# EAGLE board Aux Power Board V2.1 (EAGLE 9.6.2)
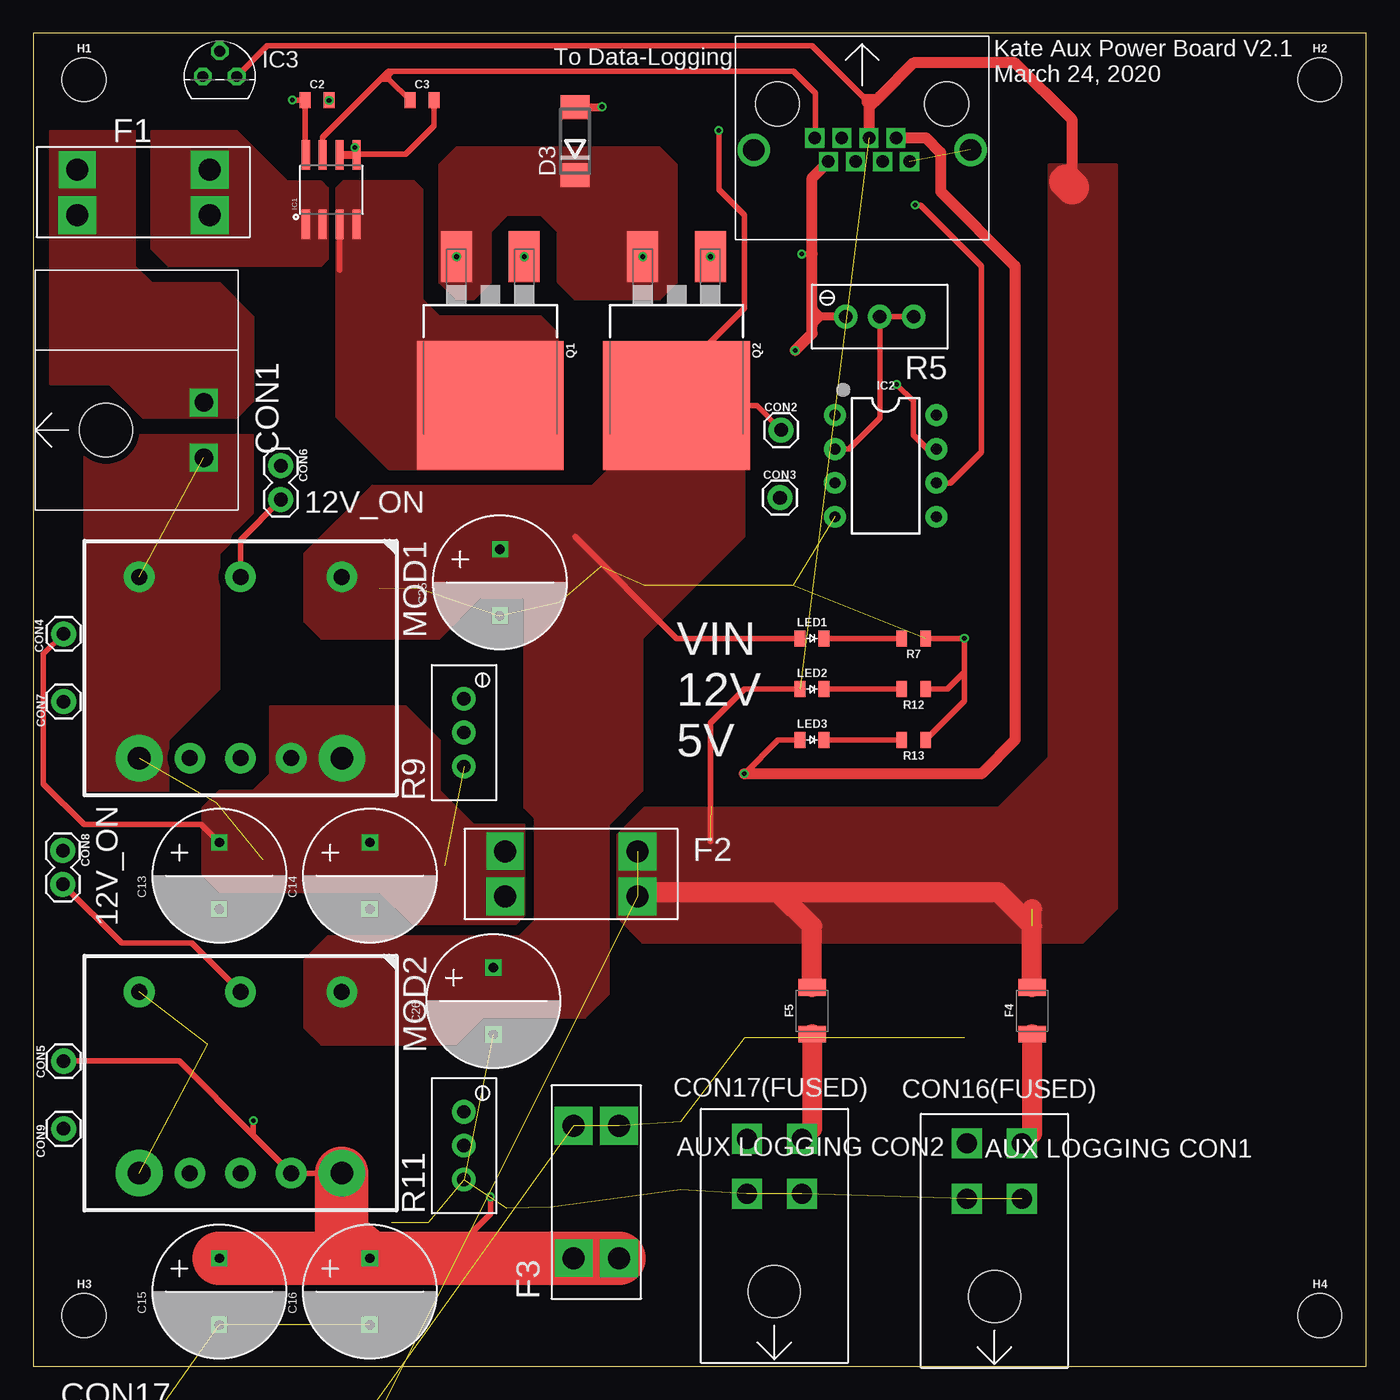
[diagram p0: board, top side]
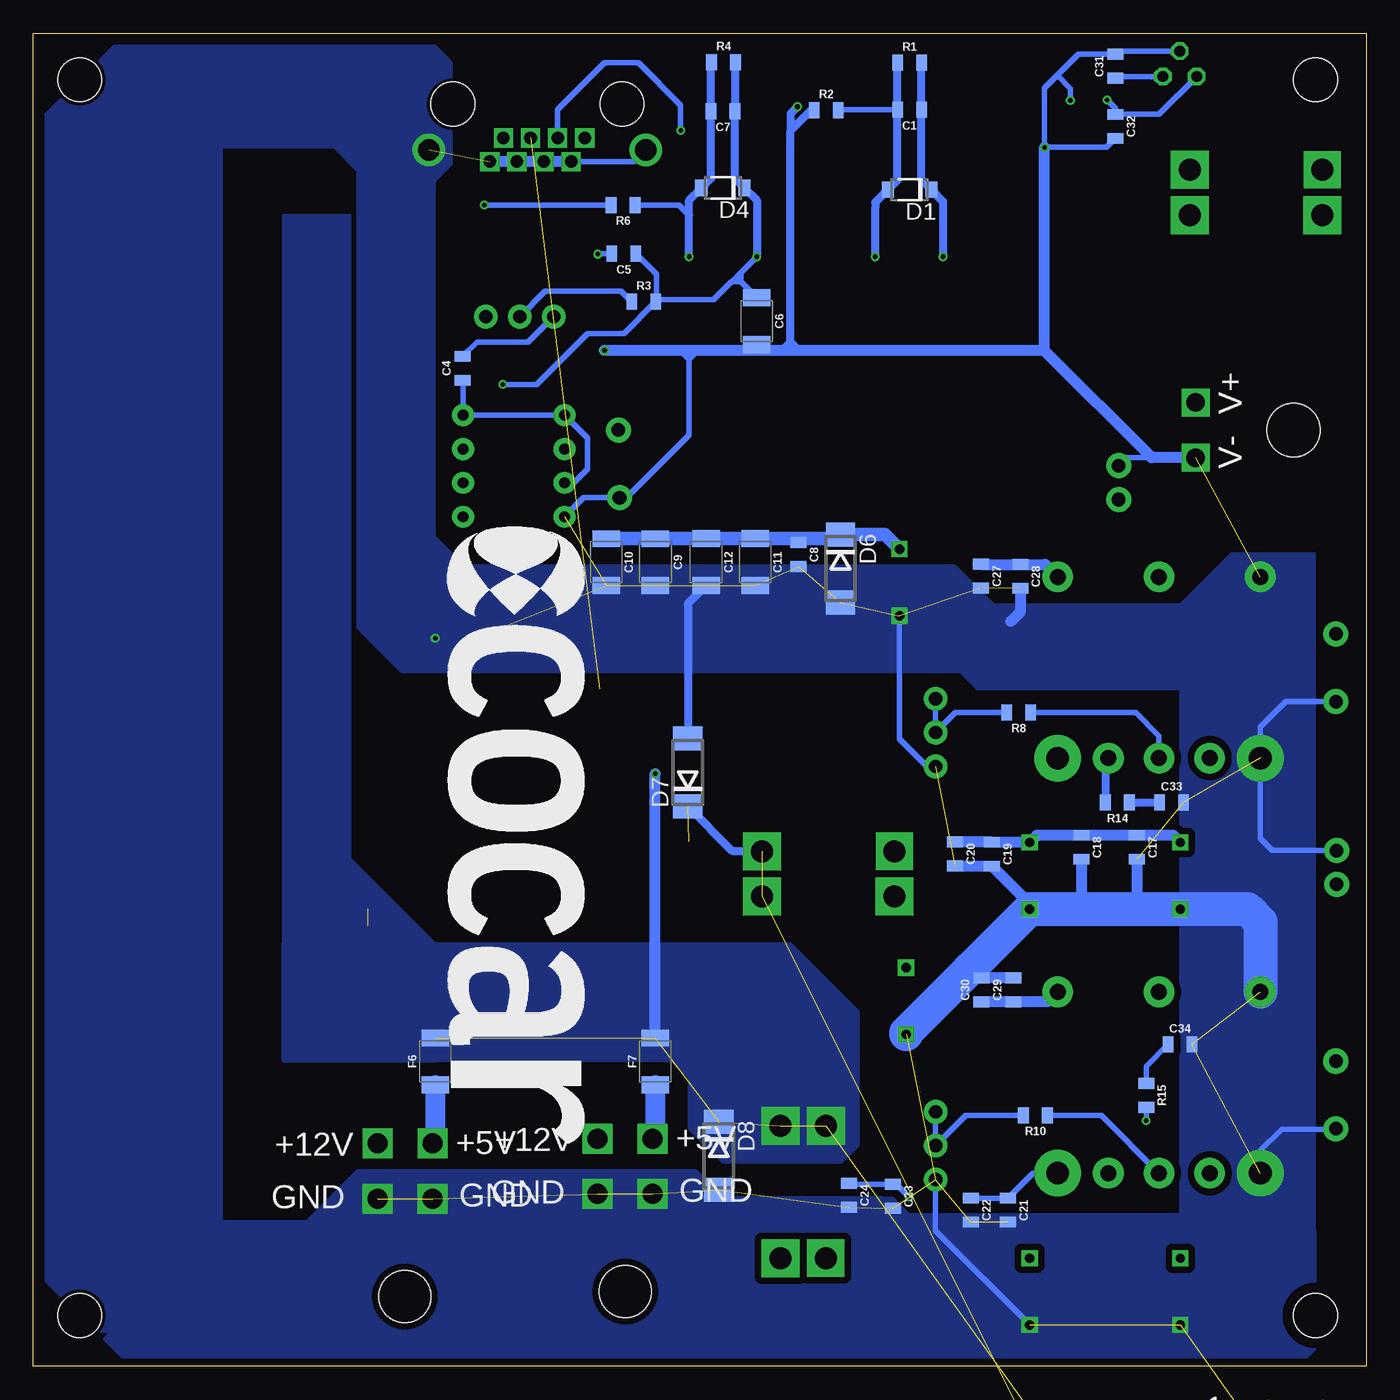
[diagram p1: board, bottom side, seen from below]

Size 100 x 100 mm. Coordinates in mm from the lower left corner, seen from the top.
Outline: 0,0 100,0 100,100 0,100 0,0
Copper layers (1*16): Top 0.035mm / dielectric 1.5mm / Bottom 0.035mm
Design rules "SeeedStudio_2layer_DRU_no_angle_20140221": minimum track width 6mil, minimum drill 12mil, track to track 6mil, track to pad 6mil, pad to pad 6mil, via to via 6mil, smd to smd 0mil, copper to edge 10mil, drill to drill 10mil, minimum pad ring 10mil, minimum via ring 6mil, stop-mask expansion 2mil, vias tented up to drill 100mil, thermal gap 10mil

## Footprints (pad centres in the part's own frame; a part is rotated, then mirrored left to right if it is on the bottom)
0805 = smd 0.8 x 1.2: 1 -0.9,0; 2 0.9,0
1210 = smd 1.27 x 2.06: 1 -1.755,0; 2 1.755,0
CAPACITOR_220UF_63V = drill 0.7 square: + 2.5,0; - -2.5,0
TE_2-PIN = drill 1.4 square: 1 -2.07,12.67; 2 2.07,12.67 | hole 4: 0,5.33
1X01 = drill 1.016 pad 1.88: 1 0,0
1X02 = drill 1.016 pad 1.88: 1 0,0; 2 2.54,0
TE_6-PIN = drill 1.5 square: 1 4.14,11.48; 2 0,11.48; 3 -4.14,11.48; 4 4.14,7.34; 5 0,7.34; 6 -4.14,7.34 | hole 3.91: 0,0
TE_4-PIN = drill 1.5 square: 1 2.07,11.48; 2 -2.07,11.48; 3 2.07,7.34; 4 -2.07,7.34 | hole 3.91: 0,0
RJ45 = drill 0.94 square: 1 9.9,2.54; 2 8.88,4.32; 3 7.87,2.54; 4 6.85,4.32; 5 5.84,2.54; 6 4.82,4.32; 7 3.81,2.54; 8 2.79,4.32 | drill 1.62: 9 -1.78,3.43; 10 14.48,3.43 | hole 3.3: 0,0; 12.7,0
SOD123FL = smd 0.91 x 1.22: A 1.625,0; C -1.625,0
DO214AA = smd 1.8 x 2.2: A 2.55,0; C -2.55,0
FUSEHOLDER_VERTICAL = drill 1.65 pad 2.85 square: 1 3.045,1.665; 3 12.965,1.665; 4 12.965,5.065 | drill 1.65 pad 2.8 square: 2 3.045,5.065
STAND-OFF = hole 3.302: 0,0
SOIC8 = smd 0.61 x 2.21: 1 -1.905,-2.616; 2 -0.635,-2.616; 3 0.635,-2.616; 4 1.905,-2.616; 5 1.905,2.616; 6 0.635,2.616; 7 -0.635,2.616; 8 -1.905,2.616
DIP08 = drill 0.813 pad 1.626: 1 -3.81,-3.81; 2 -1.27,-3.81; 3 1.27,-3.81; 4 3.81,-3.81; 5 3.81,3.81; 6 1.27,3.81; 7 -1.27,3.81; 8 -3.81,3.81
TO92 = drill 0.813 octagon: 1 1.27,0; 2 0,1.905; 3 -1.27,0
0805_LED = smd 0.8 x 1.2: 1 -0.9,0; 2 0.9,0
CONVERTER_I3A = drill 1.2 pad 2.3: 1 2.7,19.3; 2 2.7,11.7; 3 2.7,4.1; 5 16.3,7.9; 6 16.3,11.7; 7 16.3,15.5 | drill 1.7 pad 3.5: 4 16.3,4.1; 8 16.3,19.3
TO-263/D2PAK = smd 2.32 x 3.81: 1 -2.54,-7.045; 3 2.54,-7.045 | smd 11 x 9.65: 2 0,4.125
TRIMPOT = drill 1 pad 1.778: 1 5.08,0; 2 2.54,0; 3 0,0

## Placement (x,y rotation side)
C1  0.1uF  [0805]  34.26,94.26 180 bottom
C2  0.1uF  [0805]  21.29,94.97 0 top
C3  1nF  [0805]  29.16,94.97 0 top
C4  1uF  [0805]  67.79,74.87 90 bottom
C5  0.1uF  [0805]  55.69,83.46 180 bottom
C6  10uF  [1210]  45.72,78.4 270 bottom
C7  0.1uF  [0805]  48.26,94.15 180 bottom
C8  0.1uF  [0805]  42.6,60.89 270 bottom
C9  10uF  [1210]  53.32,60.32 270 bottom
C10  10uF  [1210]  57.01,60.32 270 bottom
C11  10uF  [1210]  45.85,60.33 270 bottom
C12  10uF  [1210]  49.53,60.33 270 bottom
C13  220uF  [CAPACITOR_220UF_63V]  13.95,36.8 90 top
C14  220uF  [CAPACITOR_220UF_63V]  25.25,36.8 90 top
C15  220uF  [CAPACITOR_220UF_63V]  13.95,5.6 90 top
C16  220uF  [CAPACITOR_220UF_63V]  25.25,5.6 90 top
C17  0.1uF  [0805]  17.2,38.93 270 bottom
C18  10uF  [0805]  21.37,38.93 270 bottom
C19  10uF  [0805]  28.08,38.42 270 bottom
C20  10uF  [0805]  30.85,38.44 270 bottom
C21  0.1uF  [0805]  26.87,11.7 270 bottom
C22  10uF  [0805]  29.66,11.7 270 bottom
C23  10uF  [0805]  35.51,12.74 270 bottom
C24  10uF  [0805]  38.81,12.81 270 bottom
C25  220uF  [CAPACITOR_220UF_63V]  35.01,58.8 90 top
C26  220uF  [CAPACITOR_220UF_63V]  34.51,27.4 90 top
C27  1nF/50V  [0805]  28.89,59.28 270 bottom
C28  1uF/50V  [0805]  25.96,59.25 270 bottom
C29  1nF/50V  [0805]  26.47,28.23 90 bottom
C30  1uF/50V  [0805]  28.88,28.23 90 bottom
C31  1uF  [0805]  18.82,97.53 90 bottom
C32  1uF  [0805]  18.82,93.02 270 bottom
C33  [0805]  14.61,42.29 0 bottom
C34  [0805]  13.97,24.13 0 bottom
CON1  TE_2-PIN  [TE_2-PIN]  0.13,70.23 270 top
CON2  1X01  [1X01]  56.11,70.24 0 top
CON3  1X01  [1X01]  56.02,65.16 0 top
CON4  1X01  [1X01]  2.28,54.95 90 top
CON5  1X01  [1X01]  2.28,22.89 90 top
CON6  1X02  [1X02]  18.57,67.56 270 top
CON7  1X01  [1X01]  2.28,49.87 90 top
CON8  1X02  [1X02]  2.22,38.69 270 top
CON9  1X01  [1X01]  2.28,17.81 90 top
CON10  TE_6-PIN  [TE_6-PIN]  7.5,-48.75 0 top  (outside the outline)
CON11  TE_6-PIN  [TE_6-PIN]  7.5,-80 0 top  (outside the outline)
CON12  TE_6-PIN  [TE_6-PIN]  7.5,-111.25 0 top  (outside the outline)
CON13  TE_6-PIN  [TE_6-PIN]  7.5,-142.5 0 top  (outside the outline)
CON14  TE_6-PIN  [TE_6-PIN]  7.5,-173.75 0 top  (outside the outline)
CON16(FUSED)  TE_4-PIN  [TE_4-PIN]  72.11,5.23 0 top
CON17  TE_6-PIN  [TE_6-PIN]  7.5,-17.5 0 top  (outside the outline)
CON17(FUSED)  TE_4-PIN  [TE_4-PIN]  55.6,5.59 0 top
CON18  RJ45  [RJ45]  68.53,94.69 180 top
CON19  TE_2-PIN  [TE_2-PIN]  11.25,-206.88 0 top  (outside the outline)
D1  BZT52HC10WF-7  [SOD123FL]  34.26,88.27 180 bottom
D3  SMBJ22A  [DO214AA]  40.65,91.91 90 top
D4  BZT52HC10WF-7  [SOD123FL]  48.26,88.39 180 bottom
D6  SMBJ22A  [DO214AA]  39.45,59.85 270 bottom
D7  SMBJ12A  [DO214AA]  50.89,44.54 90 bottom
D8  SMBJ5.0A  [DO214AA]  48.57,15.78 270 bottom
F1  7.5A  [FUSEHOLDER_VERTICAL]  0.25,84.71 0 top
F2  7.5A  [FUSEHOLDER_VERTICAL]  32.35,33.57 0 top
F3  7.5A  [FUSEHOLDER_VERTICAL]  45.61,5.06 90 top
F4  [1210]  74.93,26.67 90 top
F5  [1210]  58.42,26.67 90 top
F6  [1210]  69.85,22.86 90 bottom
F7  [1210]  53.34,22.86 90 bottom
F8  [1210]  1.88,-25.62 0 top  (outside the outline)
F9  [1210]  7.5,-25.62 0 top  (outside the outline)
F10  [1210]  13.12,-25.62 0 top  (outside the outline)
F11  [1210]  1.88,-30 0 top  (outside the outline)
F12  [1210]  1.88,-56.88 0 top  (outside the outline)
F13  [1210]  7.5,-56.88 0 top  (outside the outline)
F14  [1210]  13.12,-56.88 0 top  (outside the outline)
F15  [1210]  1.88,-61.25 0 top  (outside the outline)
F16  [1210]  1.88,-88.12 0 top  (outside the outline)
F17  [1210]  7.5,-88.12 0 top  (outside the outline)
F18  [1210]  13.12,-88.12 0 top  (outside the outline)
F19  [1210]  1.88,-92.5 0 top  (outside the outline)
F20  [1210]  1.88,-119.38 0 top  (outside the outline)
F21  [1210]  7.5,-119.38 0 top  (outside the outline)
F22  [1210]  13.12,-119.38 0 top  (outside the outline)
F23  [1210]  1.88,-123.75 0 top  (outside the outline)
F24  [1210]  1.88,-150.62 0 top  (outside the outline)
F25  [1210]  7.5,-150.62 0 top  (outside the outline)
F26  [1210]  13.12,-150.62 0 top  (outside the outline)
F27  [1210]  1.88,-155 0 top  (outside the outline)
F28  [1210]  1.88,-181.88 0 top  (outside the outline)
F29  [1210]  7.5,-181.88 0 top  (outside the outline)
F30  [1210]  13.12,-181.88 0 top  (outside the outline)
F31  [1210]  1.88,-186.25 0 top  (outside the outline)
H1  STAND-OFF  [STAND-OFF]  3.81,96.52 0 top
H2  STAND-OFF  [STAND-OFF]  96.52,96.52 0 top
H3  STAND-OFF  [STAND-OFF]  3.81,3.81 0 top
H4  STAND-OFF  [STAND-OFF]  96.52,3.81 0 top
IC1  CURRENT-SENSOR_ACS723  [SOIC8]  22.35,88.27 0 top
IC2  OP-AMP_LM10  [DIP08]  63.95,67.54 270 top
IC3  LINEAR-REGULATOR_LP2950  [TO92]  13.99,96.76 0 top
LED1  RED  [0805_LED]  58.42,54.61 0 top
LED2  RED  [0805_LED]  58.42,50.8 0 top
LED3  RED  [0805_LED]  58.42,46.99 0 top
MOD1  i3A  [CONVERTER_I3A]  3.84,61.92 270 top
MOD2  i3A  [CONVERTER_I3A]  3.84,30.78 270 top
Q1  [TO-263/D2PAK]  34.29,76.2 180 top
Q2  [TO-263/D2PAK]  48.26,76.2 180 top
R1  100k  [0805]  34.26,97.79 0 bottom
R2  2.7k  [0805]  40.51,94.23 0 bottom
R3  100k  [0805]  54.21,79.86 0 bottom
R4  100k  [0805]  48.22,97.83 0 bottom
R5  10k  [TRIMPOT]  66.04,78.74 180 top
R6  2.7k  [0805]  55.75,87.12 180 bottom
R7  3.9k  [0805]  66.04,54.61 180 top
R8  1.6k  [0805]  26.08,49.05 180 bottom
R9  10k  [TRIMPOT]  32.31,45 90 top
R10  8.2k  [0805]  24.82,18.82 180 bottom
R11  10k  [TRIMPOT]  32.31,14 90 top
R12  2k  [0805]  66.04,50.8 180 top
R13  560  [0805]  66.04,46.99 180 top
R14  [0805]  18.67,42.29 180 bottom
R15  [0805]  16.51,20.32 270 bottom
U$7  ECOCAR_LOGO  [ECOCAR_LOGO_2018]  68.96,62.99 270 bottom

## Library data of the parts
C1-C34 R1-R15 = EcoCar-Passives
CON1 CON10-CON14 CON16(FUSED) CON17 CON17(FUSED) CON18 CON19 = EcoCar-Connectors
CON2-CON9 = EcoCar-Connectors-2.54mm
D1 D4 LED1-LED3 Q1 Q2 = EcoCar-Discrete-Semiconductors
D3 D6-D8 F1-F31 = EcoCar-Fuses-Protection
H1-H4 U$7 = EcoCar-Miscellaneous
IC1-IC3 = EcoCar-Integrated-Circuits
MOD1 MOD2 = EcoCar-Modules

## Nets
5V: CON18.7 CON19.1 D8.C F3.3 F3.4 F6.2 F7.2 F8.2 F9.2 F12.2 F13.2 F16.2 F17.2 F20.2 F21.2 F24.2 F25.2 F28.2 F29.2 LED3.1
5V_LINEAR: C2.1 C32.1 IC1.8 IC3.3
5V_PRE_FUSE: C15.+ C16.+ C21.1 C22.1 C23.1 C24.1 CON5.1 F3.1 F3.2 MOD2.7 MOD2.8 R15.2
12V: C31.1 CON18.5 D7.C F2.3 F2.4 F4.2 F5.2 F10.2 F11.2 F14.2 F15.2 F18.2 F19.2 F22.2 F23.2 F26.2 F27.2 F30.2 F31.2 IC3.1 LED2.1
12V_PRE_FUSE: C13.+ C14.+ C17.1 C18.1 C19.1 C20.1 CON4.1 F2.1 F2.2 MOD1.7 MOD1.8 R14.2
!OUTPUT_ENABLED: IC2.6 R6.2
+5V: CON17.6 F9.1
+5V1: CON10.6 F13.1
+5V2: CON11.6 F17.1
+5V3: CON12.6 F21.1
+5V4: CON13.6 F25.1
+5V5: CON14.6 F29.1
+12V: CON17.1 F11.1
+12V1: CON10.1 F15.1
+12V2: CON11.1 F19.1
+12V3: CON12.1 F23.1
+12V4: CON13.1 F27.1
+12V5: CON14.1 F31.1
BATTERY_IN: CON1.1 F1.1 F1.2
CURRENT_SENSOR_IN: F1.3 F1.4 IC1.1 IC1.2
CURRENT_SENSOR_OUT: IC1.3 IC1.4 Q1.2
GND: C2.2 C3.2 C4.2 C5.2 C6.2 C8.2 C9.2 C10.2 C11.2 C12.2 C13.- C14.- C15.- C16.- C17.2 C18.2 C19.2 C20.2 C21.2 C22.2 C23.2 C24.2 C25.- C26.- C27.2 C28.2 C29.2 C30.2 C31.2 C32.2 C33.2 C34.2 CON1.2 CON3.1 CON6.1 CON7.1 CON8.1 CON9.1 CON10.2 CON10.5 CON11.2 CON11.5 CON12.2 CON12.5 CON13.2 CON13.5 CON14.2 CON14.5 CON16(FUSED).3 CON16(FUSED).4 CON17(FUSED).3 CON17(FUSED).4 CON17.2 CON17.5 CON18.2 CON18.4 CON18.6 CON18.8 CON18.9 CON18.10 CON19.2 D3.A D6.A D7.A D8.A IC1.5 IC1.6 IC2.4 IC3.2 MOD1.3 MOD1.4 MOD2.3 MOD2.4 R2.1 R5.1 R7.1 R9.3 R11.3 R12.1 R13.1
HALL_CURRENT: C3.1 CON18.1 IC1.7
N$1: CON16(FUSED).2 F6.1
N$2: CON16(FUSED).1 F4.1
N$3: MOD1.6 R8.1
N$4: LED1.2 R7.2
N$5: C4.1 IC2.1 IC2.3 IC2.8
N$6: IC2.2 R3.1 R5.2 R5.3
N$7: R8.2 R9.1 R9.2
N$8: C7.2 D4.A Q2.1 R4.1 R6.1
N$9: C33.1 R14.1
N$10: CON17(FUSED).1 F5.1
N$11: MOD2.6 R10.1
N$12: CON17(FUSED).2 F7.1
N$13: LED3.2 R13.2
N$14: C1.2 D1.A Q1.1 R1.1 R2.2
N$15: C34.1 R15.1
N$16: CON10.3 F14.1
N$17: LED2.2 R12.2
N$18: CON17.3 F10.1
N$19: CON10.4 F12.1
N$20: CON17.4 F8.1
N$21: CON11.3 F18.1
N$22: CON11.4 F16.1
N$23: CON12.3 F22.1
N$24: CON12.4 F20.1
N$25: CON13.3 F26.1
N$26: R10.2 R11.1 R11.2
N$27: CON13.4 F24.1
N$28: CON14.3 F30.1
N$29: CON14.4 F28.1
N$30: CON6.2 MOD1.2
N$33: CON8.2 MOD2.2
REVERSE_PROT_OUT: C1.1 C5.1 C6.1 C7.1 D1.C D3.C D4.C IC2.7 Q1.3 Q2.3 R1.2 R3.2 R4.2
VIN: C8.1 C9.1 C10.1 C11.1 C12.1 C25.+ C26.+ C27.1 C28.1 C29.1 C30.1 CON2.1 CON18.3 D6.C LED1.1 MOD1.1 MOD2.1 Q2.2

## Tracks (layer width: path | path; a pad name or v marks a point on that pad's centre or on a via)
5V  (via drill 0.35)  (17 unrouted)
  Top 0.406: LED3.1 55.88,46.99 v53.34,44.45
  Top 0.813: CON18.7 66.98,92.15 68.07,91.06 68.07,88.14 73.66,82.55 73.66,46.99 71.12,44.45 v53.34,44.45
  Bottom 0.813: F7.2 v53.34,44.45
  pour Bottom (isolate 0.5, no thermals): 39.37,15.24 48.26,15.24 50.8,17.78 50.8,20.32 50.8,21.59 52.07,22.86 81.28,22.86 81.28,31.75 43.18,31.75 38.1,26.67 38.1,20.32 38.1,16.51
  pour Bottom (isolate 0.5, no thermals): 76.2,86.36 81.28,86.36 81.28,22.86 69.85,22.86 69.85,31.75 76.2,38.1
5V_LINEAR  (via drill 0.35)
  Top 0.406: IC1.8 20.39,90.94 C2.1 20.36,95 v19.43,95
  Bottom 0.406: IC3.3 15.56,93.92 C32.1 18.82,94.39 v19.43,95
5V_PRE_FUSE  (via drill 0.35)
  Top 0.406: MOD2.8 MOD2.7 16.91,16.91 16.51,17.31 | 16.51,17.31 10.93,22.89 CON5.1 | C16.+ 30.96,8.1 34.29,11.43 v34.29,12.7 | 16.51,17.31 v16.51,18.41
  Top 4: MOD2.8 23.14,9.86 C16.+ | C15.+ C16.+ | C16.+ 35.34,8.1 35.35,8.11 F3.2 F3.1
  Bottom 0.406: MOD2.8 24.99,14.48 C21.1 C22.1 | v34.29,12.7 35.23,13.64 C23.1 38.73,13.64 C24.1 | v16.51,18.41 R15.2
12V  (16 unrouted)
  Top 0.406: LED2.1 53.34,50.8 50.8,48.26 50.8,39.37 | CON18.5 62.7,94.78 62.36,95.12 | 62.36,95.12 62.23,95.25 | 62.23,95.25 58.42,99.06 17.56,99.06 IC3.1 | 63.5,95.25 62.23,95.25 | 62.7,94.44 62.36,94.78 62.36,95.12
  Top 0.813: 77.94,88.43 77.94,93.51 73.66,97.79 66.04,97.79 63.5,95.25 62.7,94.44 CON18.5
  Top 1.5: F5.2 58.42,33.02 55.88,35.56 | 55.88,35.56 45.64,35.56 F2.3 | 74.93,33.02 72.39,35.56 55.88,35.56 | F4.2 74.93,34.29
  Top 2.54: 77.94,88.43 77.47,88.9
  Bottom 0.406: IC3.1 18.7,96.76 C31.1
  Bottom 0.61: F2.4 47.53,38.63 D7.C
  pour Top (isolate 0.5, no thermals): 43.81,33.78 43.81,39.88 45.09,41.15 45.85,41.91 50.8,41.91 72.39,41.91 76.2,45.72 76.2,90.17 81.28,90.17 81.28,34.29 78.74,31.75 45.72,31.75 43.81,33.66
12V_PRE_FUSE
  Top 0.406: CON4.1 0.76,53.43 0.76,43.69 3.81,40.64 12.61,40.64 C13.+
  Bottom 0.61: MOD1.7 19.57,45.39 R14.2
  Bottom 0.813: C20.1 30.84,39.32 C19.1 28.06,39.3 C14.+ 24.72,39.83 C18.1 C17.1 14.48,39.83 C13.+
  pour Top (isolate 0.5, no thermals): 17.78,49.53 27.94,49.53 30.48,46.99 30.48,45.72 30.48,43.18 33.02,40.64 36.83,40.64 36.83,33.78 36.2,33.15 32.38,33.15 28.45,33.15 26.04,35.56 13.97,35.56 12.7,36.83 12.7,40.64 12.7,41.91 13.97,43.18 16.51,43.18 17.78,44.45
!OUTPUT_ENABLED  (via drill 0.35)
  Top 0.406: IC2.6 68.81,66.27 71.12,68.58 71.12,82.55 66.55,87.12 v66.17,87.12
  Bottom 0.406: v66.17,87.12 R6.2
+5V  (1 unrouted)
+5V1  (1 unrouted)
+5V2  (1 unrouted)
+5V3  (1 unrouted)
+5V4  (1 unrouted)
+5V5  (1 unrouted)
+12V  (1 unrouted)
+12V1  (1 unrouted)
+12V2  (1 unrouted)
+12V3  (1 unrouted)
+12V4  (1 unrouted)
+12V5  (1 unrouted)
BATTERY_IN
  pour Top (isolate 0.5, no thermals): 13.97,71.12 8.89,71.12 8.26,71.12 5.71,73.66 1.27,73.66 1.27,92.71 7.62,92.71 7.62,82.55 8.89,81.28 13.97,81.28 16.51,78.74 16.51,72.39 15.24,71.12
CURRENT_SENSOR_IN
  pour Top (isolate 0.5, no thermals): 8.89,92.71 15.24,92.71 19.05,88.9 20.32,88.9 21.59,88.9 22.1,88.39 22.1,84.58 22.1,83.06 21.59,82.55 10.16,82.55 8.89,83.82
CURRENT_SENSOR_OUT
  Top 0.406: IC1.3 22.99,82.22
  pour Top (isolate 0.5, no thermals): 28.57,88.9 23.24,88.9 22.73,88.39 22.73,71.25 26.67,67.31 39.37,67.31 39.37,77.47 38.1,78.74 30.48,78.74 29.21,80.01 29.21,88.27
GND  (via drill 0.35)  (41 unrouted)
  Top 0.406: R13.1 69.85,49.9 69.85,52.07 | 69.85,52.07 v69.85,54.61 R7.1 | R12.1 68.58,50.8 69.85,52.07 | C3.2 30.06,93.06 27.94,90.93 24.31,90.93 IC1.5 24.13,91.01 v24.13,91.44 | v57.66,83.44 58.42,83.44
  Top 0.61: IC1.6 IC1.5 | R5.1 59.05,78.74 | 59.05,78.74 58.42,78.74 | 59.05,78.74 58.42,79.38 | 59.05,78.74 58.42,78.11 | D3.A 42.65,94.46 v42.67,94.49
  Top 0.813: v57.15,76.2 58.42,77.47 58.42,78.11 58.42,78.74 58.42,79.38 58.42,83.44 58.42,89.14 CON18.2
  Bottom 0.152: 43.69,76.2 43.81,76.2
  Bottom 0.406: CON8.1 7.03,38.69 7.94,39.6 MOD1.4 7.94,47.94 6.01,49.87 CON7.1 | CON9.1 2.31,17.78 6.35,17.78 7.94,16.19 MOD2.4 | C25.- 35.01,47.08 33.02,45.09 32.4,45.09 R9.3 | C16.- 32.31,10.16 R11.3 | 26.67,55.88 26.36,56.19 | 23.18,96.84 24.13,95.89 v24.13,91.44 19.5,91.44 C32.2 | 23.18,96.84 21.58,98.43 C31.2 18.59,98.66 IC3.2 | 23.18,96.84 22.19,95.85 C2.2 | 43.69,76.33 43.69,76.2 | CON18.10 54.95,90.37 CON18.2 | C6.2 45.72,76.2 | 50.8,76.2 50.8,75.56 | 50.8,75.56 50.8,69.85 55.49,65.16 CON3.1 58.71,65.16 IC2.4 | 50.8,75.56 50.16,76.2 | 50.8,75.56 51.44,76.2 51.69,76.2 | CON6.1 17.97,68.16 CON1.2 | C5.2 57.64,83.46 v57.66,83.44 | C30.2 29.13,29.13 29.77,29.77 | C4.2 66.72,76.83 62.87,76.83 R5.1
  Bottom 0.61: C12.2 50.89,57.21 D7.A | 43.18,76.2 43.18,76.83 | 43.18,76.83 43.18,92.71 | 43.18,92.71 41.66,94.23 R2.1 | v42.67,94.49 43.18,93.98 43.18,92.71 | 42.55,76.2 43.18,76.83 | 43.18,76.83 43.81,76.2
  Bottom 0.813: C29.2 C30.2 | C28.2 25.96,56.59 26.67,55.88 | C17.2 17.2,34.99 16.51,34.3 | C18.2 21.37,34.52 21.59,34.3 | C20.2 30.84,37.52 C19.2 25.25,34.69 C14.- | CON1.2 16.09,68.16 24.13,76.2 | 24.13,76.2 42.55,76.2 43.18,76.2 43.69,76.2 | 24.13,76.2 v24.13,91.44 | CON18.2 CON18.4 CON18.6 CON18.8 | 43.81,76.2 45.72,76.2 50.16,76.2 50.8,76.2 51.69,76.2 v57.15,76.2
  Bottom 2.54: MOD2.3 7.94,33.34 8.9,34.3 C13.- 16.51,34.3 21.59,34.3 C14.- 29.77,29.77 34.51,25.04 C26.-
  other vias: 22.19,94.97
  pour Bottom (no thermals): 85.85,95.25 85.85,2.54 95.25,2.54 99.06,6.35 99.06,93.98 95.25,97.79 85.85,97.79
  pour Bottom (no thermals): 3.81,60.96 10.16,60.96 13.97,57.15 27.94,57.15 30.86,60.07 67.69,60.07 69.85,62.23 69.85,88.9 68.58,90.17 68.58,97.79 69.85,99.06 93.98,99.06 99.06,93.98 99.06,91.44 77.47,91.44 75.69,89.66 75.69,55.37 72.39,52.07 30.48,52.07 29.21,50.8 13.97,50.8 10.03,46.86 10.03,43.18 3.81,43.18
  pour Top (isolate 0.5, no thermals): 16.51,69.85 5.08,69.85 3.81,68.58 3.81,43.18 10.16,43.18 10.16,46.99 13.97,50.8 13.97,60.96 16.51,63.5
  pour Bottom (isolate 0.5, no thermals): 10.16,10.16 3.81,10.16 3.81,1.27 4.45,0.64 7.62,0.64 93.34,0.64 99.06,6.35 99.06,11.43 86.36,11.43 85.85,10.92 83.69,10.92 79.5,10.92 75.69,14.73 50.29,14.73 48.26,12.7 36.83,12.7 35.56,12.7 34.29,11.43 10.16,11.43
  pour Bottom (isolate 0.5, no thermals): 3.81,53.34 13.97,53.34 13.97,8.89 3.81,8.89
HALL_CURRENT
  Top 0.406: IC1.7 21.72,92.2 26.04,96.52 26.07,96.56 | CON18.1 58.67,92.19 58.67,95.5 57.02,97.16 26.92,97.16 | 26.07,96.56 26.67,97.16 | 26.67,97.16 26.92,97.16 | C3.1 26.67,96.56 | 26.67,96.9 26.67,97.16 | 26.67,96.56 26.67,96.9 | 26.67,96.9 26.92,97.16 | 26.67,96.56 26.07,96.56
N$1
  Bottom 1.5: F6.1 69.85,16.9 CON16(FUSED).2
N$2
  Top 1.5: F4.1 74.93,17.46 CON16(FUSED).1
N$3
  Bottom 0.406: R8.1 17.3,49.05 15.54,47.29 MOD1.6
N$4
  Top 0.406: R7.2 LED1.2
N$5
  Bottom 0.406: IC2.3 59.46,66.27 58.42,67.31 58.42,69.63 IC2.1 IC2.8 67.76,73.94 C4.1
N$6
  Top 0.406: IC2.2 61.19,68.81 63.5,71.12 R5.2 R5.3
  Bottom 0.406: R5.2 61.59,80.64 55.9,80.64 R3.1
N$7
  Bottom 0.406: R8.2 30.8,49.05 R9.2 R9.1
N$8  (via drill 0.35)
  Bottom 0.406: R6.1 51.56,87.12 50.8,86.36
  Bottom 0.61: Q2.1 50.8,86.36 50.8,87.48 D4.A 49.16,89.12 C7.2 49.16,97.79 R4.1
  other vias: 50.8,83.25
N$9
  Bottom 0.61: R14.1 C33.1
N$10
  Top 1.5: F5.1 58.42,17.82 CON17(FUSED).1
N$11
  Bottom 0.406: MOD2.6 19.88,18.82 R10.1
N$12
  Bottom 1.5: F7.1 53.34,17.26 CON17(FUSED).2
N$13
  Top 0.406: R13.2 LED3.2
N$14  (via drill 0.35)
  Bottom 0.406: C1.2 39.59,94.26
  Bottom 0.61: Q1.1 36.83,86.36 36.83,86.89 36.83,87.32 D1.A 35.16,88.99 C1.2 R1.1 | 39.59,94.26 R2.2
  other vias: 36.83,83.25
N$15
  Bottom 0.406: R15.1 16.51,22.49 C34.1
N$16  (1 unrouted)
N$17
  Top 0.406: R12.2 LED2.2
N$18  (1 unrouted)
N$19  (1 unrouted)
N$20  (1 unrouted)
N$21  (1 unrouted)
N$22  (1 unrouted)
N$23  (1 unrouted)
N$24  (1 unrouted)
N$25  (1 unrouted)
N$26
  Bottom 0.406: R10.2 30.03,18.82 R11.2 R11.1
N$27  (1 unrouted)
N$28  (1 unrouted)
N$29  (1 unrouted)
N$30
  Top 0.406: CON6.2 15.54,61.99 MOD1.2
N$33
  Top 0.406: CON8.2 6.62,31.75 11.87,31.75 MOD2.2
REVERSE_PROT_OUT  (via drill 0.35)
  Top 0.406: v64.77,73.66 66.04,72.39 66.04,69.85 67.08,68.81 IC2.7
  Bottom 0.406: Q2.3 46.91,82.05 | 46.91,82.05 47.21,81.75 | 47.21,81.75 47.61,81.36 | 47.61,81.36 48.95,80.01 53.16,80.01 53.25,79.92 | 53.25,79.92 R3.2 55.7,77.47 58.42,77.47 62.23,73.66 v64.77,73.66 | C6.1 46.91,81.36 | 46.91,81.36 47.21,81.65 47.21,81.75 | 46.91,81.36 46.91,82.05 | 46.91,81.36 47.61,81.36 | C5.1 53.25,81.92 53.25,79.92
  Bottom 0.61: 31.71,83.29 Q1.3 31.75,87.38 D1.C 33.36,88.99 C1.1 R1.2 | Q2.3 45.72,87.48 D4.C 47.36,89.11 C7.1 47.32,94.18 R4.2
  other vias: 31.75,83.25 45.72,83.25
  pour Top (isolate 0.5, no thermals): 30.48,81.28 30.48,88.9 30.48,90.17 31.75,91.44 46.99,91.44 48.26,90.17 48.26,81.28 46.99,80.01 44.45,80.01 40.64,80.01 39.37,81.28 39.37,85.09 38.1,86.36 35.56,86.36 34.29,85.09 34.29,81.28 33.02,80.01 31.75,80.01
VIN  (via drill 0.35)
  Top 0.406: 40.64,62.23 48.26,54.61 LED1.1 | CON2.1 54.27,72.08 Q2.2 48.26,74.3 53.34,79.38 53.34,86.36 51.44,88.27 v51.44,92.71
  Bottom 0.406: CON18.3 60.66,94.28 57.15,97.79 54.61,97.79 51.44,94.61 v51.44,92.71 | C8.1 42.6,62.02 42.55,62.08
  Bottom 0.813: MOD2.1 23.89,27.33 C29.1 C30.1 | C27.1 28.86,60.15 C28.1 24.07,60.15 MOD1.1
  Bottom 1.016: C10.1 C9.1 C12.1 C11.1 42.55,62.08 39.77,62.08 D6.C 36.11,62.4 C25.+
  pour Top (no thermals): 43.18,76.2 43.18,67.31 41.91,66.04 25.4,66.04 20.32,60.96 20.32,55.88 21.59,54.61 30.48,54.61 33.53,57.66 48.77,57.66 53.34,62.23 53.34,76.2
  pour Top (no thermals): 36.83,58.42 36.83,41.91 37.59,41.15 37.59,33.4 36.45,32.26 22.1,32.26 20.32,30.48 20.32,25.4 21.59,24.13 31.75,24.13 33.78,26.16 41.4,26.16 43.18,27.94 43.18,40.64 45.72,43.18 45.72,54.61 49.53,58.42

## Text on the board
tPlace: To Data-Logging | Kate Aux Power Board V2.1 / March 24, 2020 | 12V_ON | VIN | 12V | 5V | 12V_ON
tNames: AUX LOGGING CON2 | AUX LOGGING CON1